# Altium PCB ThermoE.PcbDoc
Units mm, origin at the board's own origin, x right, y up, seen from the top; angles counter-clockwise.
Board outline 47.5 x 50 mm, 2 copper layers (Top Layer, Bottom Layer), stack 1.671 mm thick; 69 components, 53 nets, 231 pads, 103 vias.
Unrouted connection lines stored in the file: 3.
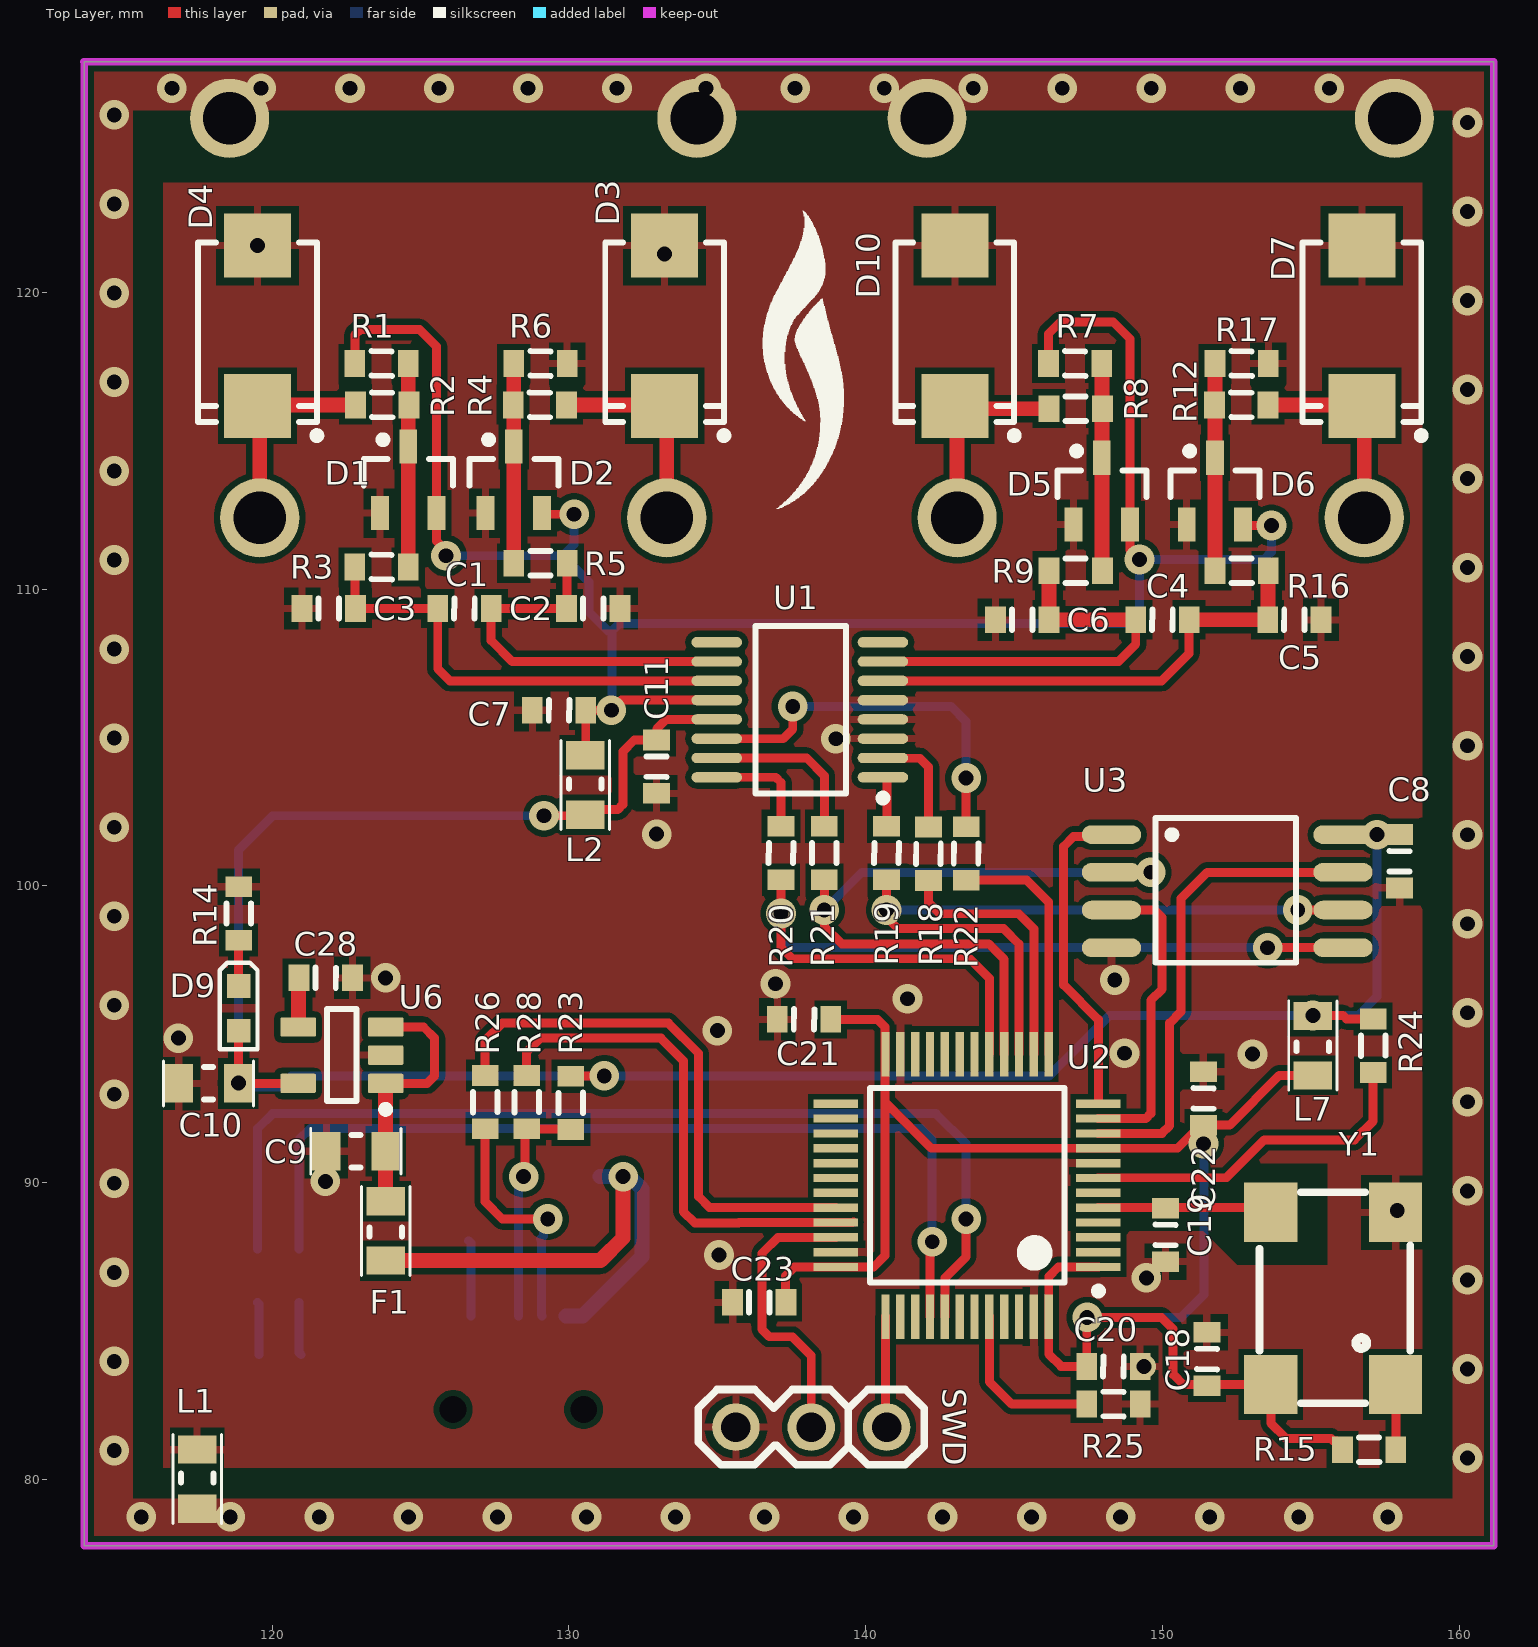
[diagram p0: Top Layer view]
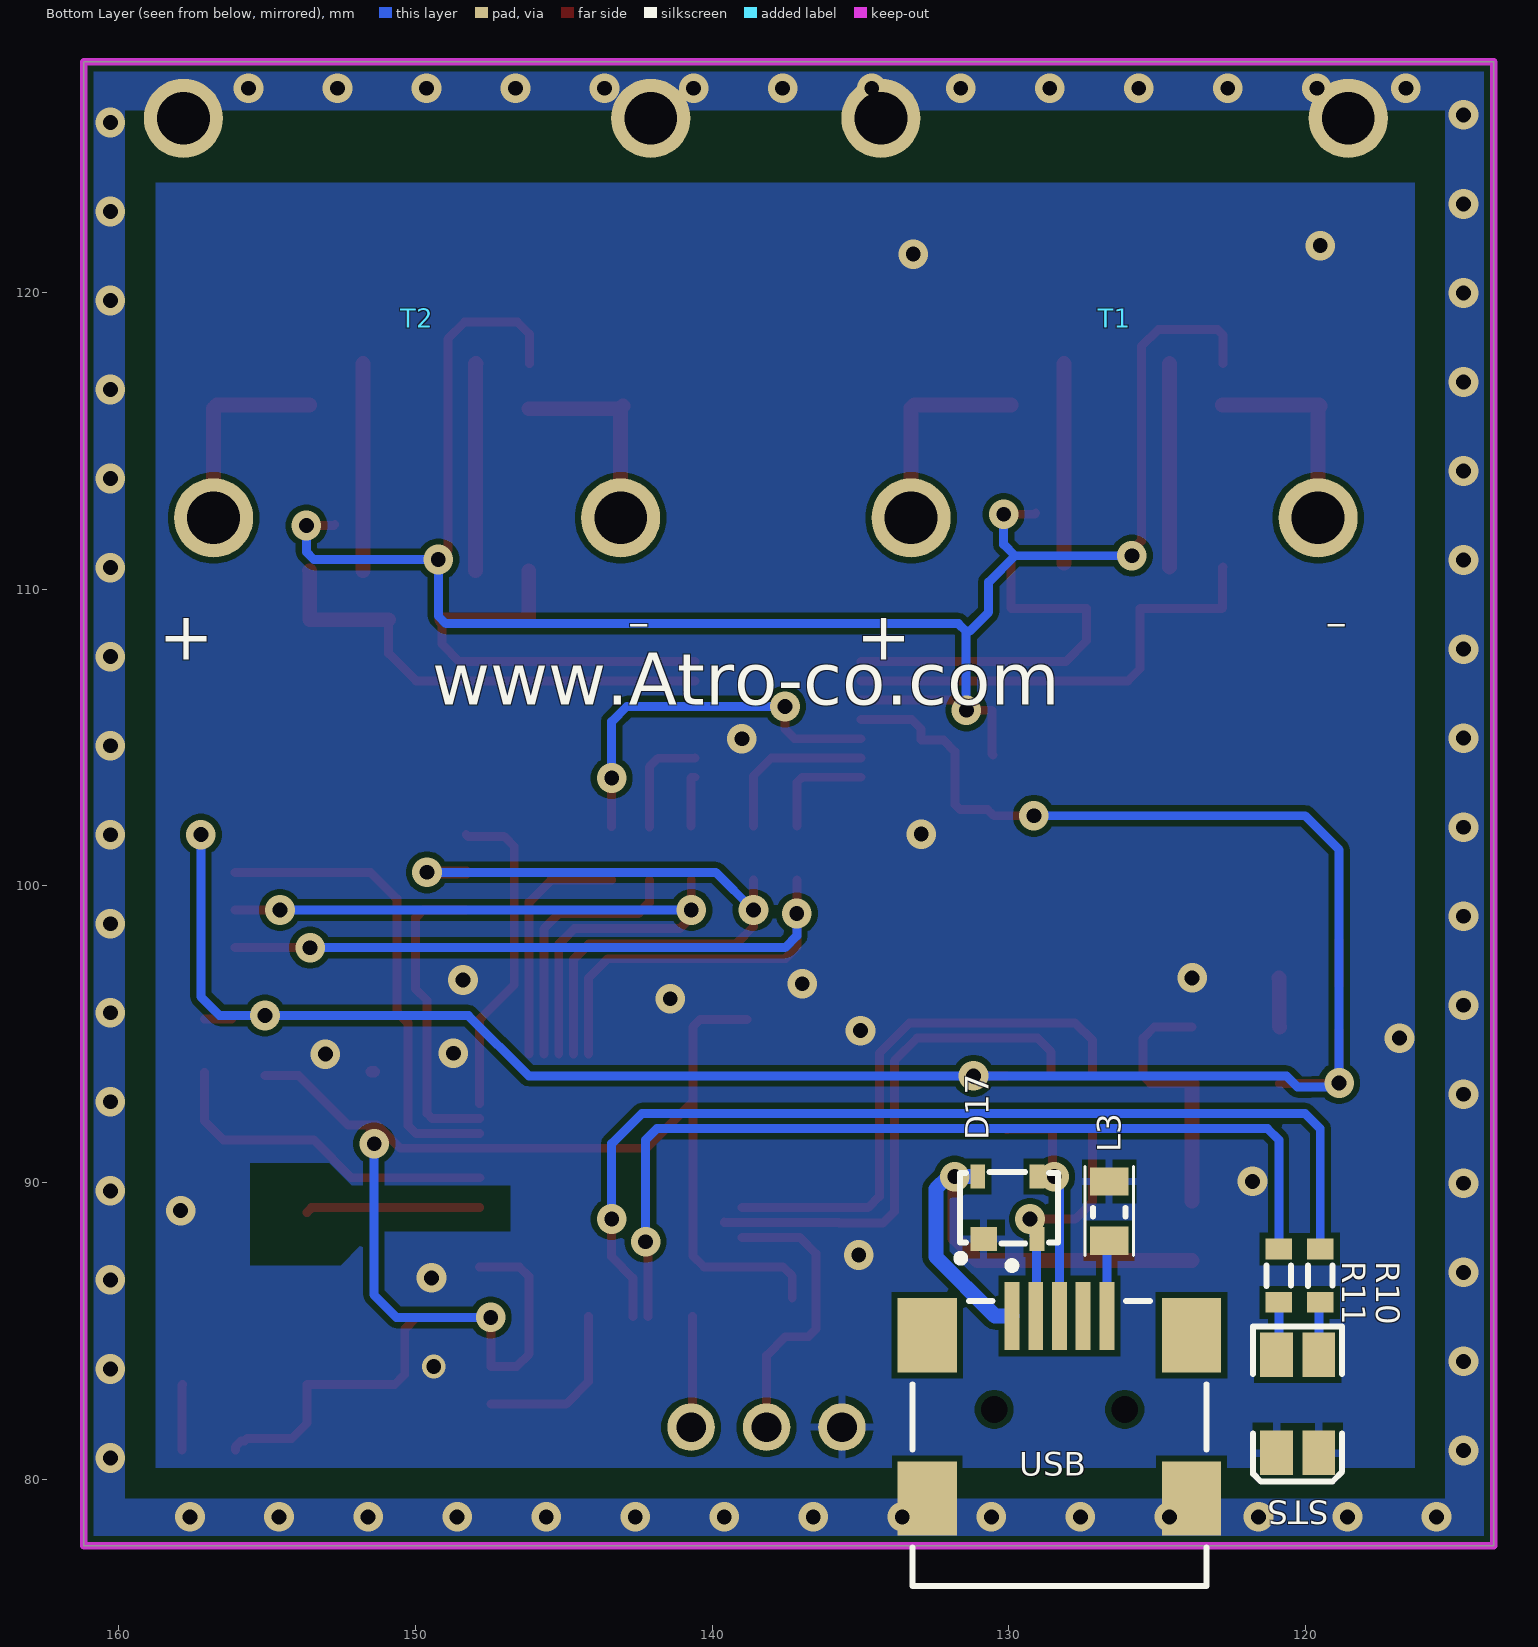
[diagram p1: Bottom Layer view, seen from below]

## Layer stack, top to bottom
Top Solder: solder mask 0.0102, Solder Resist, Dk 3.5
Top Layer: signal copper 0.0356
Dielectric 1: dielectric 1.6, FR-4, Dk 4.8
Bottom Layer: signal copper 0.0356
Bottom Solder: solder mask 0.0102, Solder Resist, Dk 3.5

## Board outline
113.665,77.762 161.165,77.762 161.165,127.762 113.665,127.762

## Design rules (kind name [scope] priority, off if disabled: settings)
Clearance [All] p1: gap=0.2 ignorepadtopadclearanceinfootprint=FALSE
ComponentClearance [All] p1: gap=0 collisioncheckmode=3 verticalgap=0 showdistances=FALSE
PolygonConnect PolygonConnect_1 [InNet('BODY')   OR ISVIA] p1: connectstyle=Direct reliefconductorwidth=0.254 reliefentries=4 polygonreliefangle="90 Angle" airgapwidth=0.254
PolygonConnect [All] p2: connectstyle=Relief reliefconductorwidth=0.254 reliefentries=4 polygonreliefangle="90 Angle" airgapwidth=0.254
RoutingVias [All] p1: holewidth=0.5 width=1 viastyle="Through Hole" minholewidth=0.5 minwidth=0.7 maxholewidth=0.8 maxwidth=1.6
SolderMaskExpansion [All] p1: expansion=0.102 istentingtop=FALSE
Width [All] p1: maxlimit=1 minlimit=0.3 preferedwidth=0.4
29 further rules are at their usual default settings.

## Classes and differential pairs
component class MCU: C8 C9 C10 C18 C19 C20 C21 C22 C23 C28 D9 D17 F1 L1 L3 L7 R10 R11 R14 R15 R23 R24 R25 R26 R28 STS SWD U2 U3 U6 USB Y1
component class ADC: C1 C2 C3 C4 C5 C6 C7 C11 D1 D2 D3 D4 D5 D6 D7 D10 L2 R1 R2 R3 R4 R5 R6 R7 R8 R9 R12 R16 R17 R18 R19 R20 R21 R22 T1 T2 U1

## Components (designator, comment, footprint, x,y, rotation, side; value= is the part's Value field where it differs from the comment)
C1 "1uF" c603 126.481,109.347 r180 top
C2 "100nF" c603 130.821,109.347 r180 top
C3 "100nF" c603 121.909,109.347 r0 top
C4 "1uF" c603 149.998,108.966 r180 top
C5 "100nF" c603 154.443,108.966 r180 top
C6 "100nF" c603 145.277,108.966 r0 top
C7 "100nF" C603 129.667,105.918 r0 top
C8 "100nF" C603 157.988,100.827 r90 top
C9 "10uF" C805 122.825,91.059 r0 top
C10 "10uF" C805 117.856,93.345 r0 top
C11 "100nF" C603 132.954,104.018 r90 top
C18 "100nF" C603 151.5,84.058 r270 top
C19 "22pF" C603 150.103,88.238 r270 top
C20 "100nF" C603 148.349,83.809 r180 top
C21 "100nF" C603 137.922,95.504 r0 top
C22 "100nF" C603 151.384,92.837 r270 top
C23 "100nF" C603 136.411,85.968 r0 top
C28 "10nF" C603 121.804,96.901 r180 top
D1 "BAV199" SOT-23 124.587,113.683 r90 top
D2 "BAV199" SOT-23 128.143,113.683 r90 top
D3 "SMBJ12CA" DO-214AA 133.223,118.872 r180 top
D4 "SMBJ12CA" DO-214AA 119.507,118.872 r180 top
D5 "BAV199" SOT-23 147.955,113.302 r90 top
D6 "BAV199" SOT-23 151.765,113.302 r90 top
D7 "SMBJ12CA" DO-214AA 156.718,118.872 r180 top
D9 "LED" led-0603 118.872,95.123 r90 top
D10 "SMBJ12CA" DO-214AA 143.002,118.872 r180 top
D17 "PRTR5V0U2X" SOT-143B 130.048,89.154 r180 bottom
F1 "Fuse 1" ptc-0805 123.834,88.368 r90 top
L1 "Inductor" R805 117.475,80.01 r270 top value=10mH
L2 "1K" r805 130.547,103.399 r270 top
L3 "Inductor" R805 126.619,89.043 r90 bottom value=10mH
L7 "Inductor" R805 155.067,94.615 r90 top value=10mH
R1 "1M" R0603 123.687,117.602 r180 top
R2 "1.69K" R0603 123.709,116.205 r180 top
R3 "500" R0603 123.687,110.744 r0 top
R4 "1.69K" R0603 129.021,116.205 r0 top
R5 "500" R0603 129.043,110.871 r180 top
R6 "1M" R0603 129.043,117.602 r180 top
R7 "1M" R0603 147.055,117.602 r180 top
R8 "1.69K" R0603 147.077,116.078 r180 top
R9 "500" R0603 147.077,110.617 r0 top
R10 "220" R0603 119.507,86.868 r90 bottom
R11 "220" R0603 120.904,86.868 r90 bottom
R12 "1.69K" R0603 152.654,116.205 r0 top
R14 "1K" R0603 118.872,99.071 r90 top
R15 "10K" R0603 156.961,80.999 r180 top
R16 "500" R0603 152.665,110.617 r180 top
R17 "1M" R0603 152.665,117.602 r180 top
R18 "47" R0603 142.113,101.081 r90 top
R19 "47" R0603 140.701,101.108 r90 top
R20 "47" R0603 137.145,101.108 r90 top
R21 "47" R0603 138.606,101.108 r90 top
R22 "47" R0603 143.383,101.092 r90 top
R23 "1.5K" R0603 130.064,92.688 r270 top
R24 "10K" R0603 157.099,94.615 r90 top
R25 "1K" R0603 148.349,82.539 r180 top
R26 "20" R0603 127.178,92.715 r90 top
R28 "20" R0603 128.575,92.715 r90 top
STS "LED-RG" LED-1210 120.269,82.55 r270 bottom
SWD "CONN-3" PHDR3 140.705,81.761 r90 top
T1 "TYPE-K" PCC-SMP 125.665,120.762 r90 bottom
T2 "TYPE-K" PCC-SMP 149.165,120.762 r90 bottom
U1 "ADS1120PW" TSSOP-16 137.78,105.934 r180 top
U2 "STM32F103C8T6" LQFP-48 143.416,89.909 r180 top
U3 "W25Q64JVSSIQ" SOIC-8W 148.283,101.727 r0 top
U6 "TPS73633DBVT" DBV0005A_M 122.35,94.295 r180 top
USB "USB MINI" USB-MINI-SMD 128.297,82.158 r270 bottom
Y1 "8MHz" ASV 153.65,83.2 r90 top

## Footprints (in the part's own frame and the unit in brackets; to place one, negate y for a bottom-side part, rotate by r counter-clockwise, add the part's x,y. Pads: shape width x height; smd on the part's side, far side on the other; paste and mask are expansions set on the pad)
ASV [mm] "OSC 5x7"
  rect 2x1.8 smd: 1(0,-4.2) 2(5.8,-4.2) 3(5.8,0) 4(0,0)
  silkscreen extent -0.63,-4.7 6.48,0.38, body extent -0.58,-4.7 6.42,0.38, height 1.8
c603 [mm]
  rect 0.7x0.9 smd: 1(-0.9,0) 2(0.9,0)
  silkscreen extent -0.35,-0.34 0.35,0.34, body extent -0.76,-0.38 0.76,0.38, height 0.6
C603 [mm]
  rect 0.7x0.9 smd: 1(-0.9,0) 2(0.9,0)
  silkscreen extent -0.35,-0.34 0.35,0.34, body extent -0.76,-0.38 0.76,0.38, height 0.6
C805 [mm]
  rect 0.95x1.3 smd: 1(-1,0) 2(1,0)
  silkscreen extent -1.52,-0.76 1.52,0.76, body extent -1,-0.62 1,0.63, height 0.78
DBV0005A_M [mm] "SOT23, 5-Leads, Body 3.05x1.75mm, Pitch 0.95mm, IPC Low Density"
  rrect15% 1.2x0.65 smd: 1(-1.475,0.95) 2(-1.475,0) 3(-1.475,-0.95) 4(1.475,-0.95) 5(1.475,0.95)
  silkscreen extent -1.6,-1.55 0.5,1.95, body extent -1.42,-1.46 1.42,1.46, height 1.08
DO-214AA [mm]
  rect 2.26x2.16 smd: 1(0,-2.7) 2(0,2.7)
  silkscreen extent -2.13,-2.8 2,3.82, body extent -1.8,-2.7 1.8,2.7, height 2.3
led-0603 [mm]
  rect 0.8x0.8 smd: 1(0,0) 2(1.5,0)
  silkscreen extent -0.64,-0.64 2.29,0.64, body extent -0.04,-0.41 1.56,0.38, height 0.7
LED-1210 [mm]
  rect 1.5x1.1 smd: 1(-1.651,0.713) 2(-1.651,-0.713) 3(1.651,-0.713) 4(1.651,0.713)
  silkscreen extent -2.6,-1.5 2.62,1.5, body extent -1.62,-1.36 1.62,1.34, height 1.1
LQFP-48 [mm]
  rect 1.5x0.28 smd: 1(-4.425,2.75) 2(-4.425,2.25) 3(-4.425,1.75) 4(-4.425,1.25) 5(-4.425,0.75) 6(-4.425,0.25) 7(-4.425,-0.25) 8(-4.425,-0.75) 9(-4.425,-1.25) 10(-4.425,-1.75) 11(-4.425,-2.25) 12(-4.425,-2.75) 25(4.425,-2.75) 26(4.425,-2.25) 27(4.425,-1.75) 28(4.425,-1.25) 29(4.425,-0.75) 30(4.425,-0.25) 31(4.425,0.25) 32(4.425,0.75) 33(4.425,1.25) 34(4.425,1.75) 35(4.425,2.25) 36(4.425,2.75)
  rect 0.28x1.5 smd: 13(-2.75,-4.425) 14(-2.25,-4.425) 15(-1.75,-4.425) 16(-1.25,-4.425) 17(-0.75,-4.425) 18(-0.25,-4.425) 19(0.25,-4.425) 20(0.75,-4.425) 21(1.25,-4.425) 22(1.75,-4.425) 23(2.25,-4.425) 24(2.75,-4.425) 37(2.75,4.425) 38(2.25,4.425) 39(1.75,4.425) 40(1.25,4.425) 41(0.75,4.425) 42(0.25,4.425) 43(-0.25,4.425) 44(-0.75,4.425) 45(-1.25,4.425) 46(-1.75,4.425) 47(-2.25,4.425) 48(-2.75,4.425)
  silkscreen extent -4.55,-3.27 3.27,3.68, body extent -4.5,-4.5 4.5,4.5, height 1.6
PCC-SMP [mil]
  round 105 hole 70: 0(200.79,-279.53) 0(200.79,340.47) 1(-329.21,-239.53) 2(-329.21,300.47)
  body extent -429,-282 390,337, height 388
PHDR3 [mm]
  round 1.6 hole 1: 1(0,0) 2(0,2.54) 3(0,5.08)
  silkscreen extent -1.27,-1.27 1.27,6.35, body extent -1.27,-1.27 1.27,6.35, height 8.39
ptc-0805 [mm]
  rect 0.95x1.3 smd: 1(1.008,0.009) 2(-0.992,0.009)
  silkscreen extent -1.49,-0.8 1.51,0.82, body extent -1.07,-0.67 1.07,0.67, height 0.66
R0603 [mm]
  rect 0.7x0.9 smd: 1(-0.9,0) 2(0.9,0)
  silkscreen extent -0.34,-0.42 0.34,0.42, body extent -0.76,-0.38 0.76,0.38, height 0.45
R805 [mm]
  rect 0.95x1.3 smd: 1(1,0) 2(-1,0)
  silkscreen extent -1.5,-0.81 1.5,0.81, body extent -1,-0.61 1,0.64, height 0.78
r805 [mm]
  rect 0.95x1.3 smd: 1(1,0) 2(-1,0)
  silkscreen extent -1.5,-0.81 1.5,0.81, body extent -1,-0.61 1,0.64, height 0.78
SOIC-8W [mm]
  oval 2x0.625 smd: 1(0,0) 2(0,-1.27) 3(0,-2.54) 4(0,-3.81) 5(7.8,-3.81) 6(7.8,-2.54) 7(7.8,-1.27) 8(7.8,0)
  silkscreen extent 1.48,-4.32 6.21,0.57, body extent -0.3,-4.59 8.1,0.79, height 2.3
SOT-23 [mm]
  rect 1.15x0.6 smd: 1(-1.125,0.95) 2(-1.125,-0.95) 3(1.125,0)
  silkscreen extent -0.2,-1.5 1.47,1.5, body extent -1.13,-1.5 1.13,1.5, height 1.2
SOT-143B [mm]
  rect 0.9x0.8 smd: 1(-0.8,-1.05)
  rect 0.5x0.8 smd: 2(1,-1.05) 3(1,1.05) 4(-1,1.05)
  silkscreen extent -1.7,-1.82 1.7,1.2, body extent -1.46,-1.21 1.46,1.21, height 1.65
TSSOP-16 [mm]
  oval 1.7x0.35 smd: 1(-2.8,2.275) 2(-2.8,1.625) 3(-2.8,0.975) 4(-2.8,0.325) 5(-2.8,-0.325) 6(-2.8,-0.975) 7(-2.8,-1.625) 8(-2.8,-2.275) 9(2.8,-2.275) 10(2.8,-1.625) 11(2.8,-0.975) 12(2.8,-0.325) 13(2.8,0.325) 14(2.8,0.975) 15(2.8,1.625) 16(2.8,2.275)
  silkscreen extent -2.93,-2.82 1.5,3.1, body extent -3.2,-2.5 3.2,2.5, height 1.1
USB-MINI-SMD [mm]
  rect 2.5x2 smd: 0(-2.7,-4.45) 0(-2.7,4.45) 0(2.8,-4.45) 0(2.8,4.45)
  rect 2.3x0.5 smd: 1(-3.35,-1.6) 2(-3.35,-0.8) 3(-3.35,0) 4(-3.35,0.8) 5(-3.35,1.6)
  round 0.6 hole 0.9 unplated: MH1(-0.2,2.2) MH2(-0.2,-2.2)
  silkscreen extent -5.17,-4.95 5.75,4.95, body extent -3.5,-5.05 5.75,4.85, height 3.93

## Part data
C1 C2 C3 C4 C5 C6 C7 C8 C9 C10 C11 C18 C19 C20 C21 C22 C23 C28: library part Cap, "Capacitor", Designer="Parsa Malekpour"
D3 D4 D7 D10: library part SMBJxxCA, "Surface Mount Transient Voltage Suppressors Diode"
D17: "Ultra low capacitance double rail-to-rail ESD protection diode", reverse standoff voltage=5.5V
F1: "Fuse", LatestRevisionDate=17-Jul-2002, LatestRevisionNote="Re-released for DXP Platform.", PackageDescription="Thru-Hole; 2 Leads", PackageReference=PIN-W2/E2.8, Published=8-Jun-2000, Publisher="Altium Limited"
L2: library part "Ferrite Bead", "FERRITE BEAD", Code_IEC=1005, Code_JEITA=0402, LatestRevisionDate=29-May-2009, LatestRevisionNote="IPC-7351 Footprint Added.", PackageDescription="Chip Inductor", Published=8-Jun-2000, Publisher="Altium Limited"
R1 R2 R3 R4 R5 R6 R7 R8 R9 R10 R11 R12 R14 R15 R16 R17 R18 R19 R20 R21 R22 R23 R24 R25 R26 R28: library part Resistor, "Resistor", Designer="Parsa Malekpour"
STS: library part LED-RG-4
SWD: "Header, 3-Pin"
T1 T2: library part THERMOCOUPLE
U1: "ADS1120 4-Channel, 2-kSPS, Low-Power, 16-Bit ADC with Integrated PGA and Reference"
U2: "STM32 ARM-based 32-bit MCU with 64 Kbytes Flash, 48-pin LQFP, Industrial Temperature", ComponentLink1Description="Manufacturer Link", ComponentLink1URL=www.st.com/stm32, ComponentLink2Description=Datasheet, ComponentLink2URL=http://www.st.com/stonline/products/literature/ds/13587.pdf, DatasheetVersion="rev6, Mar-2008", PackageDescription="48-Pin Low-Profile Quad Flat Pack, 7 x 7 mm Body, 0.5 mm Pitch (LQFP48)", PackageReference=LQFP48, PackageVersion=Mar-2008, Published=30-May-2008, Publisher="Altium Limited"
U6: library part CMP-0395-00251-2, "Single Output Low Noise LDO, 400 mA, Fixed 3.3 V Output, 1.7 to 5.5 V Input, with Reverse Current Protection, 5-pin SOT-23 (DBV), -40 to 85 degC, Green (RoHS & no Sb/Br)", Manufacturer="Texas Instruments", Rating=Catalog, Accuracy(%)=1, Code_JEDEC=MO-178, ComponentLink1Description="Manufacturer URL", ComponentLink1URL=http://www.ti.com/, ComponentLink2Description=Datasheet, ComponentLink2URL=http://www.ti.com/general/docs/lit/getliterature.tsp?genericPartNumber=TPS73633&fileType=pdf, ComponentLink3Description="Package Specification", ComponentLink3URL=http://www.ti.com/litv/pdf/mpds018i, ComponentLink4Description="URL Link1", ComponentLink4URL="Samples URL:http://www.ti.com/product/tps73633#samples", DatasheetVersion=SBVS038T, Eco-Plan="Green (RoHS & no Sb/Br)", Fixed Output Options(V)=3.3, Iout(Max)(A)=0.4, Iq(Typ)(mA)=0.3, Mounting Technology="Surface Mount", PackageDescription="5-Pin Plastic Small Outline, Body 1.60 Ãƒâ€” 2.90 mm, Pitch 0.95 mm", PackageReference=DBV0005A, PackageVersion=4073253-4/K, PartNumber=TPS73633DBVT, SubFamily="Single Channel LDO", Vdo(Typ)(mV)=75, Vin(Max)(V)=5.5, Vin(Min)(V)=1.7, Vout Adj(Max)(V)=3.3, Vout Adj(Min)(V)=3.3
Y1: library part OSCILLATOR, "OSCILLATOR", Frequency=8MHz
L1 L3 L7: Code_IEC=1005, Code_JEITA=0402, LatestRevisionDate=29-May-2009, LatestRevisionNote="IPC-7351 Footprint Added.", PackageDescription="Chip Inductor", PackageReference=0402-A, Published=8-Jun-2000, Publisher="Altium Limited"

## Via types
v1: diameter 1, hole 0.5, Top Layer to Bottom Layer, 61 vias
v2: diameter 1, hole 0.5, Top Layer to Bottom Layer, tented both sides, 41 vias
v3: diameter 0.8, hole 0.5, Top Layer to Bottom Layer, tented both sides, 1 vias

## Nets (pads, with @x,y where several pads share a name; then routed paths per layer and width w, separated by ;. In a path a pad name is that pad's centre, name@x,y a point inside that pad or via, vN(x,y) a via of type N, cw(c..) or ccw(c..) an arc to the next point about the centre after c; other vN are vias at no path point)
+3.3V: C8.2 C10.2 C11.2 D9.1 L2.1 L7.1 R23.1 R24.2 U1.13 U3.8 U6.5 | length 79.3
  Top Layer w0.3: C10.2 v2(118.872,93.361) D9.1 ; C10.2@118.872,93.345 U6.5 ; v2(129.159,102.362) 130.51,102.362 L2.1 130.72,102.572 131.641,102.572 131.817,102.748 131.817,104.526 132.209,104.918 C11.2 132.96,104.924 132.96,105.288 133.281,105.609 U1.13 ; R23.1 130.07,93.594 131.186,93.594 v2(131.191,93.599) ; v2(155.067,95.631) 156.083,95.631 156.199,95.515 R24.2 ; v2(157.226,101.727) v2@157.353,101.727
  Bottom Layer w0.3: v2(129.159,102.362) 120.015,102.362 118.872,101.219 v2(118.872,93.361) 119.006,93.227 119.795,93.227 119.804,93.218 120.269,93.218 120.65,93.599 v2(131.191,93.599) 146.177,93.599 148.209,95.631 v2(155.067,95.631) 156.591,95.631 157.226,96.266 v2(157.226,101.727)
+5V: C9.2 F1.1 U6.1 U6.3 | length 8.8
  Top Layer w0.3: U6.1 125.222,93.345 125.476,93.599 125.476,94.869 125.1,95.245 U6.3
  Top Layer w0.5: F1.1 C9.2 U6.1
AVDD: C7.2 D1.2 D2.2 D5.2 D6.2 L2.2 R1.2 R7.2 U1.12 | length 67.9
  Top Layer w0.3: R1.2 122.787,118.569 122.963,118.745 124.968,118.745 125.537,118.176 D1.2 125.537,111.624 125.857,111.304 v2(125.857,111.125) ; D2.2 129.129,112.522 v2(130.175,112.522) ; L2.2@130.541,104.41 130.567,104.436 C7.2 v2(131.431,105.918) 131.772,106.259 U1.12 ; R7.2 146.155,118.596 146.558,118.999 148.336,118.999 148.905,118.43 D5.2 148.905,111.318 v2(149.225,110.998) ; D6.2 152.751,112.141 v2(153.67,112.141)
  Bottom Layer w0.3: v2(125.857,111.125) 129.794,111.125 ; v2(130.175,112.522) 130.175,111.506 129.794,111.125 ; v2(131.431,105.918) 131.445,105.932 131.445,108.585 ; v2(153.67,112.141) 153.67,111.252 153.416,110.998 v2(149.225,110.998) 149.225,109.093 148.971,108.839 131.699,108.839 131.445,108.585 ; 129.794,111.125 130.683,110.236 130.683,109.22 131.318,108.585 131.445,108.585
BODY: L1.1 T1.0 T2.0 USB.0
  other v1: 115.59,78.74 118.59,78.74 121.59,78.74 124.59,78.74 127.59,78.74 130.59,78.74 133.59,78.74 136.59,78.74 139.59,78.74 142.59,78.74 145.59,78.74 148.59,78.74 151.59,78.74 154.59,78.74 157.59,78.74 160.274,80.724 114.681,80.978 160.274,83.724 114.681,83.978 160.274,86.724 114.681,86.978 160.274,89.724 114.681,89.978 160.274,92.724 114.681,92.978 160.274,95.724 114.681,95.978 160.274,98.724 114.681,98.978 160.274,101.724 114.681,101.978 160.274,104.724 114.681,104.978 160.274,107.724 114.681,107.978 160.274,110.724 114.681,110.978 160.274,113.724 114.681,113.978 160.274,116.724 114.681,116.978 160.274,119.724 114.681,119.978 160.274,122.724 114.681,122.978 160.274,125.724 114.681,125.978 116.623,126.873 119.623,126.873 122.623,126.873 125.623,126.873 128.623,126.873 131.623,126.873 134.623,126.873 137.623,126.873 140.623,126.873 143.623,126.873 146.623,126.873 149.623,126.873 152.623,126.873 155.623,126.873
BOOT0: R25.2 U2.44 | length 5.8
  Top Layer w0.3: U2.44 144.166,83.293 144.92,82.539 R25.2
FLASH-HOLD: U2.10 U3.7 | length 16.1
  Top Layer w0.3: U2.10 149.98,91.659 150.241,91.92 150.241,95.377 150.622,95.758 150.622,99.568 151.511,100.457 U3.7
FLASH-WP: U2.11 U3.3 | length 10.4
  Top Layer w0.3: U2.11 149.43,92.159 149.606,92.335 149.606,96.139 149.987,96.52 149.987,98.933 149.733,99.187 U3.3
GND: C2.1 C3.1 C5.1 C6.1 C7.1 C8.1 C9.1 C10.1 C11.1 C18.1 C19.2 C20.1 C21.1 C22.1 C23.1 C28.1 D1.1 D2.1 D3.1 D4.1 D5.1 D6.1 D7.1 D10.1 D17.1 L1.2 L3.1 R6.1 R14.2 R17.1 R25.1 STS.3 STS.4 SWD.3 U1.3 U1.4 U1.5 U2.8 U2.23 U2.35 U2.47 U3.4 U6.2 Y1.2 | length 0.1
  Top Layer w0.4: C22.1 C22.1@151.484,93.737
  other v2: 149.456,86.791 135.058,87.56 157.907,89.057 121.793,90.043 153.031,94.332 148.717,94.361 116.84,94.869 135.001,95.123 141.408,96.196 136.963,96.704 148.393,96.831 123.825,96.901 132.954,101.743 138.995,104.959 133.223,121.285 119.507,121.572
  other v3: 149.376,83.809
LED1: R11.2 U2.40 | length 31.3
  Top Layer w0.3: U2.40 142.166,87.937 v2(142.24,88.011)
  Bottom Layer w0.3: R11.2 120.904,91.44 121.285,91.821 141.859,91.821 142.24,91.44 v2(142.24,88.011)
LED2: R10.2 U2.41 | length 34.7
  Top Layer w0.3: U2.41 142.666,86.786 143.383,87.503 v2(143.383,88.773)
  Bottom Layer w0.3: R10.2 119.507,91.821 120.015,92.329 142.367,92.329 143.383,91.313 v2(143.383,88.773)
NetC1_1: C1.1 C2.2 R5.1 U1.10 | length 13
  Top Layer w0.3: R5.1 129.932,110.86 129.932,109.358 C2.2 C1.1 127.381,108.267 128.089,107.559 U1.10
NetC1_2: C1.2 C3.2 R3.1 U1.11 | length 15.8
  Top Layer w0.3: R3.1 122.798,110.733 122.798,109.358 C3.2 C1.2 125.581,107.315 125.987,106.909 U1.11
NetC4_1: C4.1 C5.2 R16.1 U1.6 | length 16.1
  Top Layer w0.3: U1.6 149.973,106.909 150.898,107.834 C4.1
  Top Layer w0.5: C4.1 C5.2 153.554,108.977 153.554,110.606 R16.1
NetC4_2: C4.2 C6.2 R9.1 U1.7 | length 14.2
  Top Layer w0.3: U1.7 148.516,107.559 149.098,108.14 C4.2
  Top Layer w0.5: R9.1 C6.2 C4.2
NetC19_1: C19.1 U2.5 Y1.3 | length 5.9
  Top Layer w0.3: U2.5 150.103,89.159 153.491,89.159 Y1.3
NetC28_2: C28.2 U6.4 | length 1.7
  Top Layer w0.5: U6.4 120.89,95.259 120.89,96.887 C28.2
NetD1_3: D1.3 R1.1 R2.1 R3.2 | length 6.9
  Top Layer w0.5: R3.2 D1.3 R1.1
NetD2_3: D2.3 R4.1 R5.2 R6.2 | length 6.7
  Top Layer w0.5: R5.2 D2.3 R6.2
NetD3_2: D3.2 R4.2 T1.2 | length 7.1
  Top Layer w0.5: R4.2 133.19,116.205 D3.2 133.297,116.098 T1.2
NetD4_2: D4.2 R2.2 T1.1 | length 7.1
  Top Layer w0.5: T1.1 119.581,116.098 D4.2 119.54,116.205 R2.2
NetD5_3: D5.3 R7.1 R8.1 R9.2 | length 7
  Top Layer w0.5: R7.1 147.966,117.591 147.966,110.628 R9.2
NetD6_3: D6.3 R12.1 R16.2 R17.2 | length 7
  Top Layer w0.5: R16.2 D6.3 R17.2
NetD7_2: D7.2 R12.2 T2.2 | length 7.3
  Top Layer w0.5: R12.2 156.685,116.205 D7.2 156.797,116.093 T2.2@156.797,112.034
NetD9_2: D9.2 R14.1 | length 1.5
  Top Layer w0.3: D9.2 R14.1
NetD10_2: D10.2 R8.2 T2.1 | length 7.3
  Top Layer w0.5: D10.2 D10.2@143.081,116.093 ; T2.1@143.081,112.034 D10.2@143.081,116.093 ; R8.2 143.096,116.078 D10.2@143.081,116.093
NetD17_2: D17.2 R26.1 USB.2 | length 8.2
  Top Layer w0.3: R26.1 127.178,89.357 127.762,88.773 v2(129.286,88.773)
  Bottom Layer w0.3: USB.2 129.073,85.533 129.073,88.079 D17.2 129.148,88.204 129.148,88.446 129.286,88.584 v2(129.286,88.773)
NetD17_3: D17.3 R23.2 R28.1 USB.3 | length 7.9
  Top Layer w0.3: v2(128.473,90.204) 128.524,90.255 128.524,91.764 R28.1 128.589,91.801 130.051,91.801 R23.2
  Bottom Layer w0.3: USB.3 128.297,90.028 v2(128.473,90.204)
NetL3_2: L3.2 USB.5 | length 2.6
  Bottom Layer w0.3: L3.2 126.697,87.965 USB.5
NetR10_1: R10.1 STS.1 | length 1.8
  Bottom Layer w0.3: R10.1 119.556,85.919 STS.1
NetR11_1: R11.1 STS.2 | length 1.8
  Bottom Layer w0.3: R11.1 120.904,84.279 STS.2
NetR15_1: R15.1 Y1.1 | length 2.2
  Top Layer w0.3: Y1.1 157.861,83.189 R15.1
NetR18_2: R18.2 U1.2 | length 3.7
  Top Layer w0.3: U1.2 140.59,104.299 141.827,104.299 142.113,104.013 R18.2
NetR19_2: R19.2 U1.1 | length 1.8
  Top Layer w0.3: U1.1 140.693,103.659 140.716,103.636 140.716,102.023 R19.2
NetR20_2: R20.2 U1.16 | length 3.7
  Top Layer w0.3: U1.16 136.969,103.659 137.145,103.483 R20.2
NetR21_2: R21.2 U1.15 | length 5.6
  Top Layer w0.3: U1.15 138.007,104.309 138.606,103.71 R21.2
NetR22_2: R22.2 U1.14 | length 13.1
  Top Layer w0.3: U1.14 137.217,104.959 137.541,105.283 v2(137.541,106.045) ; R22.2 v2(143.383,103.632)
  Bottom Layer w0.3: v2(137.541,106.045) 142.875,106.045 143.383,105.537 v2(143.383,103.632)
NetU2_29: U2.29
NetU2_30: U2.30
NetU2_31: U2.31
NetU2_38: U2.38
NRST: R24.1 U2.7 | length 11.7
  Top Layer w0.3: U2.7@147.821,90.166 152.155,90.166 153.429,91.44 156.464,91.44 157.099,92.075 R24.1
SPI-CLK: R19.1 U2.15 U3.6 | length 25.2
  Top Layer w0.3: R19.1 v2(140.701,99.187) 140.701,98.948 141.089,98.56 144.645,98.56 145.166,98.039 U2.15 ; v2(154.559,99.187) U3.6
  Bottom Layer w0.3: v2(140.701,99.187) v2(154.559,99.187)
SPI-CS0: R18.1 U2.14 | length 8.9
  Top Layer w0.3: R18.1 142.113,99.441 142.494,99.06 145.161,99.06 145.666,98.555 U2.14
SPI-CS1: U2.12 U3.1 | length 10.9
  Top Layer w0.3: U2.12 147.841,95.491 146.666,96.666 146.666,101.327 147.004,101.665 148.221,101.665 U3.1
SPI-INT: R22.1 U2.13 | length 8.2
  Top Layer w0.3: R22.1 145.426,100.192 146.166,99.452 U2.13
SPI-MISO: R21.1 U2.16 U3.2 | length 24.1
  Top Layer w0.3: R21.1 v2(138.606,99.187) 138.606,98.63 139.192,98.044 144.145,98.044 144.666,97.523 U2.16
  Top Layer w0.4: U3.2 v2(149.606,100.457)
  Bottom Layer w0.3: v2(138.606,99.187) 139.876,100.457 v2(149.606,100.457)
SPI-MOSI: R20.1 U2.17 U3.5 | length 32.1
  Top Layer w0.3: R20.1 v2(137.145,99.07) 137.145,97.932 137.533,97.544 143.51,97.544 144.166,96.888 U2.17 ; v2(153.543,97.917) U3.5
  Bottom Layer w0.3: v2(137.145,99.07) 137.145,98.313 137.541,97.917 v2(153.543,97.917)
SWCLK: SWD.1 U2.37 | length 3.7
  Top Layer w0.3: SWD.1@140.666,81.761 U2.37
SWDIO: SWD.2 U2.34 | length 9.7
  Top Layer w0.3: SWD.2 138.165,84.174 137.53,84.809 136.757,84.809 136.503,85.063 136.503,87.614 137.048,88.159 U2.34
USBDM: R26.2 U2.32 | length 18.6
  Top Layer w0.3: R26.2 127.178,94.793 127.762,95.377 133.35,95.377 134.366,94.361 134.366,89.535 134.742,89.159 U2.32
USBDP: R28.2 U2.33 | length 17.6
  Top Layer w0.3: R28.2 128.575,94.412 129.032,94.869 133.096,94.869 133.858,94.107 133.858,89.027 134.239,88.646 135.715,88.646 135.728,88.659 U2.33 139.581,88.659 U2.33@139.591,88.669
VMCU: C18.2 C20.2 C21.2 C22.2 C23.2 L7.2 R15.2 U2.1 U2.9 U2.24 U2.36 U2.48 Y1.4 | length 59.5
  Top Layer w0.3: C23.2@137.3,86.106 137.3,86.857 137.602,87.159 U2.36 140.269,87.159 140.646,87.536 140.646,92.726 ; C21.2 140.392,95.504 140.646,95.25 140.646,92.726 ; U2.1 146.492,87.159 146.166,86.833 U2.48 146.166,84.225 146.582,83.809 C20.2 147.449,85.449 v2(147.46,85.46) 149.96,85.46 150.357,85.063 150.357,83.539 150.696,83.2 Y1.4 153.65,81.897 154.167,81.38 155.68,81.38 155.761,81.299 155.861,81.299 156.061,81.099 R15.2 ; v2@151.292,91.478 C22.2@151.524,91.71 ; L7.2 153.94,93.615 152.262,91.937 C22.2 151.284,91.937 150.506,91.159 U2.9 142.213,91.159 140.646,92.726
  Bottom Layer w0.3: v2(147.46,85.46) 150.635,85.46 151.397,86.222 v2@151.397,91.313
  other v2: 151.384,91.313
VUSB: D17.4 F1.2 USB.1 | length 17.6
  Top Layer w0.5: F1.2 131.064,87.376 131.826,88.138 v2(131.826,90.204)
  Bottom Layer w0.5: USB.1 130.466,85.508 132.461,87.503 132.461,89.789 132.046,90.204 v2(131.826,90.204) D17.4
pads on no net: U1.8 U1.9 U2.2 U2.3 U2.4 U2.6 U2.18 U2.19 U2.20 U2.21 U2.22 U2.25 U2.26 U2.27 U2.28 U2.39 U2.42 U2.43 U2.45 U2.46 USB.4 USB.MH1 USB.MH2

## Polygon pours and split planes (outlines as drawn)
GND on Top Layer "GND_L01_P001" (solid, pour order 1): 116.332,80.391 116.332,123.698 158.75,123.698 158.75,80.391
BODY on Top Layer "BODY_L01_P000" (solid, pour order 0): 113.665,127.762 161.165,127.762 161.165,77.762 113.665,77.762 113.665,79.375 115.316,79.375 115.316,126.111 159.766,126.111 159.766,79.375 113.665,79.375
BODY on Bottom Layer "BODY_L02_P003" (solid, pour order 3): 113.665,127.762 161.165,127.762 161.165,77.762 113.665,77.762 113.665,79.375 115.316,79.375 115.316,126.111 159.766,126.111 159.766,79.375 113.665,79.375
GND on Bottom Layer "GND_L02_P002" (solid, pour order 2): 116.332,80.391 116.332,123.698 158.75,123.698 158.75,80.391

## Keep-outs
Keep-Out Layer:
  the board outline again, w0.254

## Other copper
Multi-Layer:
  pour cut-out: 146.801,89.889 146.801,88.365 151.373,88.365 152.516,87.222 155.564,87.222 155.564,90.651 152.897,90.651 152.135,89.889

## Silkscreen, mask and mechanical layers (free items; w line width, h text height)
Top Overlay:
  drawing of 2 lines, arcs and shapes, not listed
Bottom Overlay:
  text "www.Atro-co.com" at 149.421,105.53 h3
  text "ALL-IN-ONE 2 CHANNEL THERMOCOUPLE DATALOGGER & DAQ DEVICE" at 158.224,94.675 h3
Top Solder:
  lines w1.5: 114.681,78.74 114.681,126.873 160.274,126.873 160.274,78.74 114.681,78.74
Bottom Solder:
  lines w1.5: 114.681,78.74 160.274,78.74 160.274,126.873 114.681,126.873 114.681,78.74

## Text inside footprints (layer, text, board x,y; h text height)
T1: Bottom Overlay "+" at 133.297,109.562 h2.76 r180; Bottom Overlay "-" at 118.565,109.86 h2.76 r180
T2: Bottom Overlay "+" at 156.797,109.562 h2.76 r180; Bottom Overlay "-" at 142.065,109.86 h2.76 r180
USB: Mechanical 1 "PCB Edge" at 132.333,76.676 h0.25